# Altium PCB PCB1.PcbDoc (part 1 of 2)
Units mm, origin at the board's own origin, x right, y up, seen from the top; angles counter-clockwise.
Board outline 52.96 x 71.5 mm, 2 copper layers (Top Layer, Bottom Layer); 40 components, 74 nets, 275 pads, 212 vias.
Unrouted connection lines stored in the file: 1.
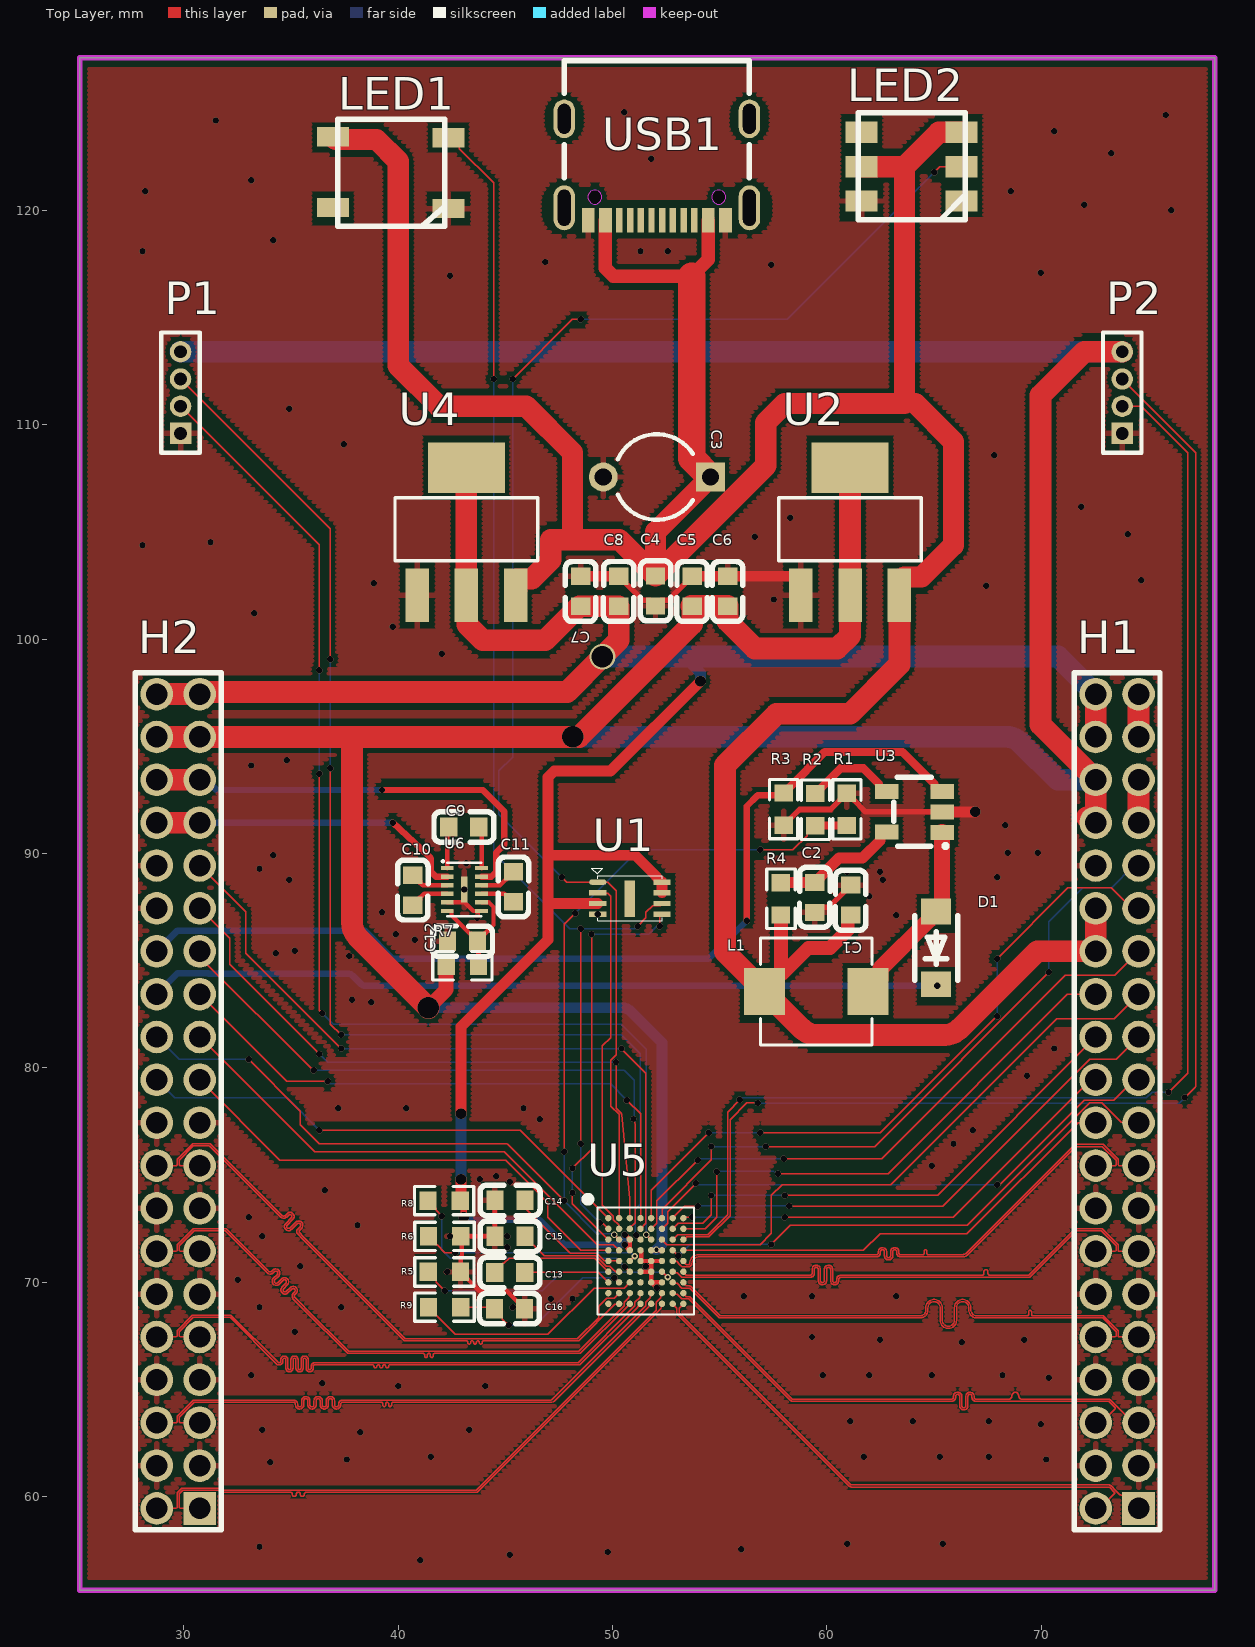
[diagram p0: Top Layer view]
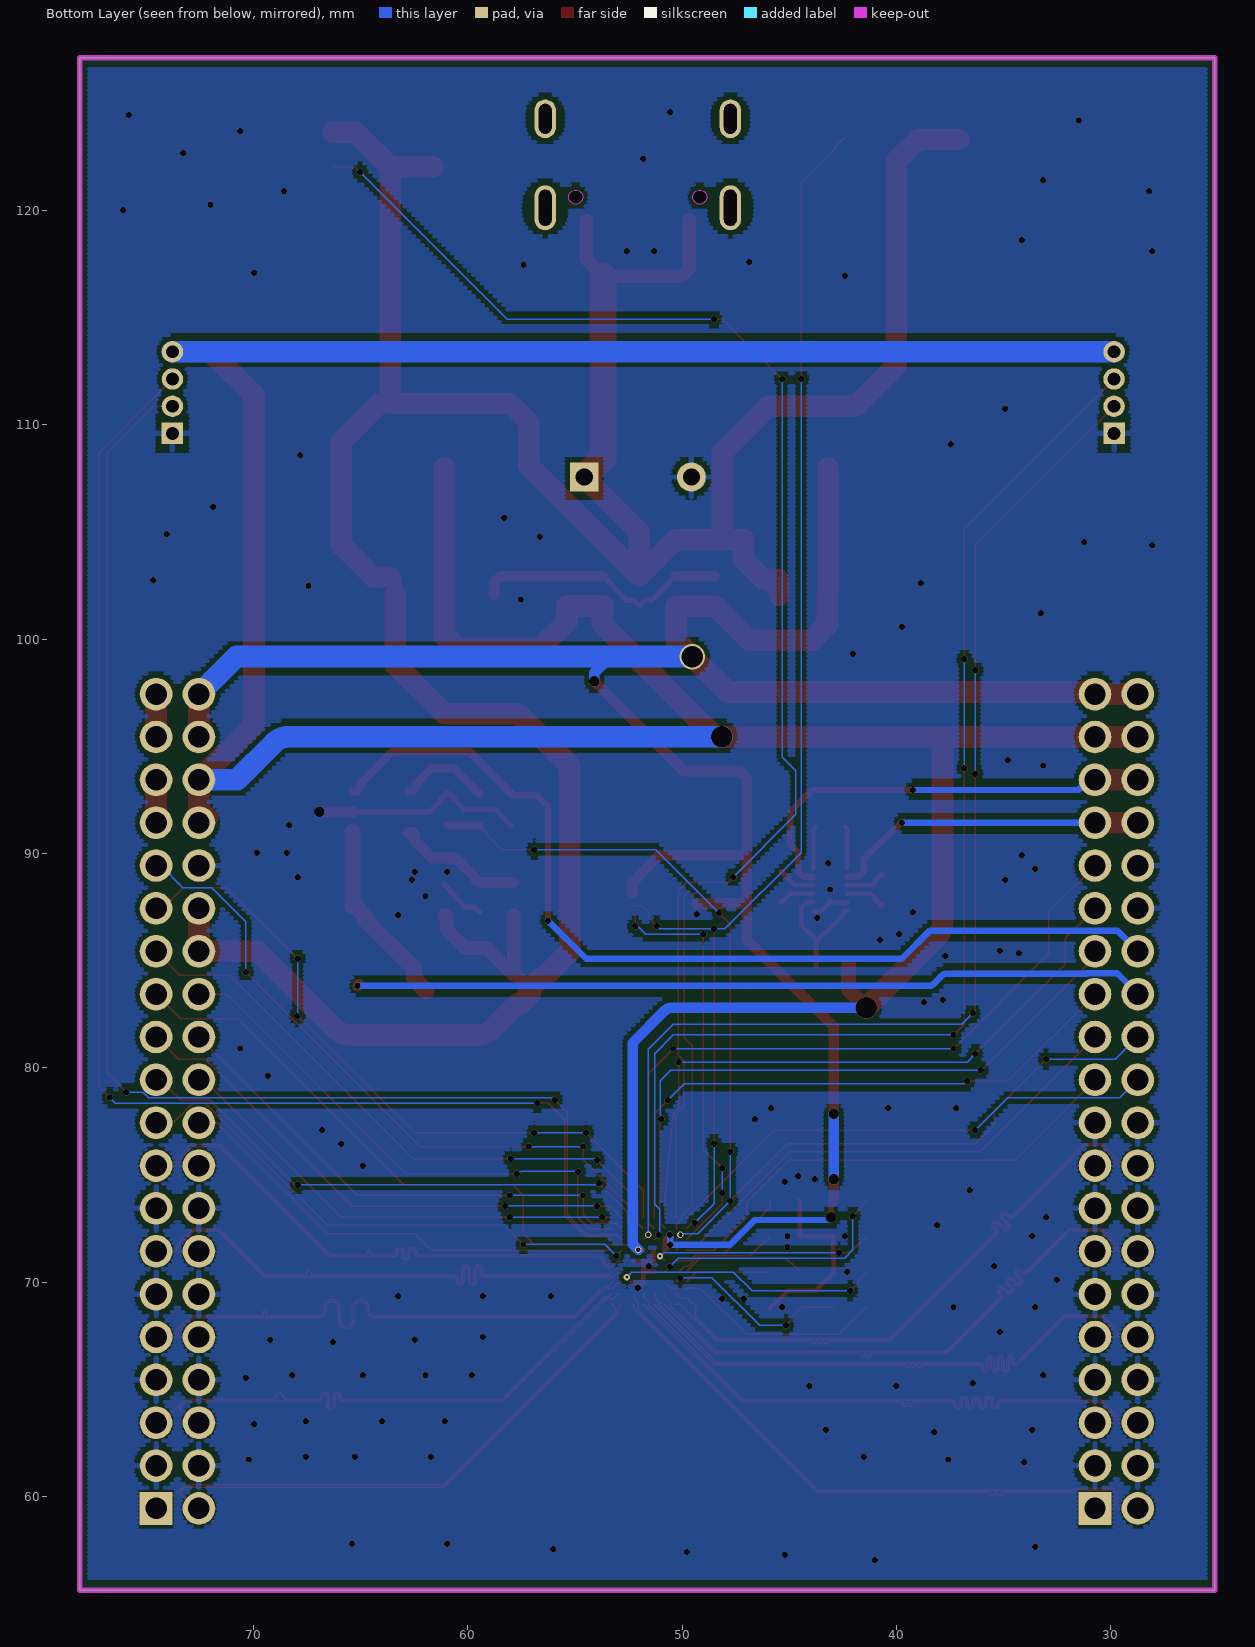
[diagram p1: Bottom Layer view, seen from below]

## Layer stack, top to bottom
Top Solder: solder mask 0.0102, Solder Resist, Dk 3.5
Top Layer: signal copper 0.0356
Dielectric 1: dielectric 0.32, FR-4, Dk 4.8
Bottom Layer: signal copper 0.0356
Bottom Solder: solder mask 0.0102, Solder Resist, Dk 3.5

## Board outline
25.146,55.626 25.146,127.127 78.105,127.127 78.105,55.626

## Design rules (kind name [scope] priority, off if disabled: settings)
Clearance Clearance_5 [InDifferentialPairClass('TD_MIPI')] p1: gap=0.04 ignorepadtopadclearanceinfootprint=FALSE
Clearance Clearance_4 [InDifferentialPairClass('AP_MIPI')] p2: gap=0.04 ignorepadtopadclearanceinfootprint=FALSE
Clearance [InComponent('TFT1')] p3: gap=0.04 ignorepadtopadclearanceinfootprint=TRUE
Clearance Clearance_3 [All] p4: gap=0.05 ignorepadtopadclearanceinfootprint=TRUE
Clearance Clearance_2 [All] p5 off: gap=0.2 ignorepadtopadclearanceinfootprint=FALSE // Protel DXP Scope 1 Expression Was: (InPolygon)   Protel DXP Scope 1 Expression Was: (InPolygon)   Protel DXP Scope 1 Expression Was: (InPolygon)   Protel DXP Scope 1 Expression Was: (InPolygon)   Protel DXP Scope 1 Expression Was: (InPolygon)   Protel DXP
Clearance Clearance_1 [All] p6 off: gap=0.1 ignorepadtopadclearanceinfootprint=FALSE // Protel DXP Scope 1 Expression Was: (IsVia)   Protel DXP Scope 1 Expression Was: (IsVia)   Protel DXP Scope 1 Expression Was: (IsVia)   Protel DXP Scope 1 Expression Was: (IsVia)   Protel DXP Scope 1 Expression Was: (IsVia)   Protel DXP Scope 1 Expression
ComponentClearance [All] p1 off: gap=0.254 collisioncheckmode=3 verticalgap=0.254 showdistances=FALSE
DiffPairsRouting [All] p1: maxlimit=0.254 minlimit=0.04 mostfreqgap=0.04 toplayer_minwidth=0.06 toplayer_maxwidth=0.06 toplayer_prefwidth=0.06 bottomlayer_minwidth=0.06 bottomlayer_maxwidth=0.06 bottomlayer_prefwidth=0.06 maxuncoupledlength=12.7
FabricationTestPointUsage TestPointUsage [All] p1: valid=0 allowmultiple=FALSE
FabricationTestpoint Testpoint [All] p1: side=3 testpointundercomponent=TRUE minsize=1.016 maxsize=2.54 preferedsize=1.524 minholesize=0 maxholesize=1.016 preferedholesize=0.813 testpointgrid=0.025 allowsidetop=TRUE allowsidebottom=TRUE usegrid=TRUE gridtolerance=0
FanoutControl Fanout_Small [All] p1 off: bgadir=Out bgaviamode=Centered fanoutstyle=Auto fanoutdirection=Alternating viagrid=0.025 // Protel DXP Scope 1 Expression Was: (CompPinCount < 5)   Fanout_Small (Default Rule)
FanoutControl Fanout_Default [All] p2: bgadir=Out bgaviamode=Centered fanoutstyle=Auto fanoutdirection=Alternating viagrid=0.025 // Fanout_Default (Default Rule)
FanoutControl Fanout_SOIC [All] p3 off: bgadir=Out bgaviamode=Centered fanoutstyle=Auto fanoutdirection=Alternating viagrid=0.025 // Protel DXP Scope 1 Expression Was: IsSOIC   Fanout_SOIC (Default Rule)
FanoutControl Fanout_BGA [All] p4 off: bgadir=Out bgaviamode=Centered fanoutstyle=Auto fanoutdirection=Alternating viagrid=0.025 // Protel DXP Scope 1 Expression Was: IsBGA   Fanout_BGA (Default Rule)
FanoutControl Fanout_LCC [All] p5 off: bgadir=Out bgaviamode=Centered fanoutstyle=Auto fanoutdirection=Alternating viagrid=0.025 // Protel DXP Scope 1 Expression Was: IsLCC   Fanout_LCC (Default Rule)
HoleSize [All] p1 off: absolutevalues=TRUE maxlimit=2.54 minlimit=0.025 maxpercent=80.000 minpercent=20.000
HoleToHoleClearance [All] p1: gap=0 allowstackedmicrovias=TRUE
MinimumSolderMaskSliver [All] p1: minsoldermaskwidth=0
PolygonConnect [All] p1: thpad.connectstyle=Relief thpad.reliefconductorwidth=0.254 thpad.reliefentries=4 thpad.polygonreliefangle="90 Angle" thpad.airgapwidth=0.254 smdpad.connectstyle=Relief smdpad.reliefconductorwidth=0.254 smdpad.reliefentries=4 smdpad.polygonreliefangle="90 Angle" smdpad.airgapwidth=0.254 via.connectstyle=Direct via.reliefconductorwidth=0.254 via.reliefentries=4 via.polygonreliefangle="90 Angle" via.airgapwidth=0.254
RoutingCorners [All] p1 off: cornerstyle=Round minsetback=2.54 maxsetback=5.08
RoutingVias [All] p1: holewidth=0.2 width=0.4 viastyle="Through Hole" minholewidth=0.1 minwidth=0.25 maxholewidth=0.3 maxwidth=0.5
ShortCircuit [All] p1 off: allowed=FALSE
SilkToSilkClearance [All] p1: silktosilkclearance=0
SilkToSolderMaskClearance [IsPad] p1: minsilkscreentomaskgap=0 clearancetoexposedcopper=TRUE
SolderMaskExpansion [All] p1: expansion=0.102 istentingtop=FALSE
UnConnectedPin [All] p1 off:
Width [All] p1: maxlimit=2 minlimit=0.06 preferedwidth=0.2
14 further rules are at their usual default settings.

## Classes and differential pairs
differential pair class TD_MIPI: TD_CLK TD_D0 TD_D1 TD_D2 TD_D3
differential pair class AP_MIPI: AP_CLK AP_D0 AP_D1 AP_D2 AP_D3
differential pair AP_D3: +AP_D3P -AP_D3N
differential pair AP_D2: +AP_D2P -AP_D2N
differential pair AP_D1: +AP_D1P -AP_D1N
differential pair AP_D0: +AP_D0P -AP_D0N
differential pair AP_CLK: +AP_CLKP -AP_CLKN
differential pair TD_D3: +TD_D3P -TD_D3N
differential pair TD_D2: +TD_D2P -TD_D2N
differential pair TD_D1: +TD_D1P -TD_D1N
differential pair TD_D0: +TD_D0P -TD_D0N
differential pair TD_CLK: +TD_CLKP -TD_CLKN

## Components (designator, comment, footprint, x,y, rotation, side; value= is the part's Value field where it differs from the comment)
C1 "47UF" C0603 61.115,87.822 r90 top
C2 "1UF" C0603 59.436,87.949 r270 top
C3 "Cap2" CAPR5-4X5 52.07,107.569 r180 top value=100pF
C4 "1UF" C0603 52.006,102.25 r270 top
C5 "10UF" C0603 53.721,102.235 r90 top
C6 "1UF" C0603 55.372,102.235 r90 top
C7 "10UF" C0603 48.514,102.235 r90 top
C8 "1UF" C0603 50.292,102.235 r90 top
C9 "1uF/10V" C0603 43.06,91.24 r180 top
C10 "1uF/10V" C0603 40.678,88.288 r270 top
C11 "1uF/10V" C0603 45.377,88.446 r90 top
C12 "4.7uF/6.3V" C0603 42.995,85.906 r180 top
C13 "1UF,6.3V,X5R" C0603 45.206,70.449 r180 top
C14 "1UF" C0603 45.214,73.813 r180 top
C15 "1UF,6.3V,X5R" C0603 45.212,72.136 r180 top
C16 "4.7UF" C0603 45.198,68.759 r0 top
D1 "1N5819HW-7-F" SOD-123_L2.8-W1.8-LS3.7-FD 65.101,85.592 r270 top
H1 "PZ200-2-20-Z" HDR-TH_40P-P2.00-V-M-R2-C20-S2.00 73.549,78.438 r90 top
H2 "PZ200-2-20-Z" HDR-TH_40P-P2.00-V-M-R2-C20-S2.00 29.734,78.438 r90 top
L1 "L_4R7uH" IND-SMD_L5.2-W5.1 59.513,83.56 r180 top value=4.7uH
LED1 "WS2812" WS2812_LED_4 79.083,194.962 r0 top
LED2 "WS2812" WS2812_LED_6 66.294,120.447 r0 top
P1 "MHDR1X4" MHDR1X4 29.845,109.601 r90 top
P2 "MHDR1X4" MHDR1X4 73.787,109.601 r90 top
R1 "Res2" R0603 60.936,92.061 r270 top value=100K
R2 "Res2" R0603 59.463,92.044 r270 top value=10K
R3 "Res2" R0603 57.989,92.069 r90 top value=5R
R4 "Res2" R0603 57.862,87.887 r270 top value=10R
R5 "Res2" R0603 42.155,70.472 r0 top value=4.02K
R6 "Res2" R0603 42.164,72.136 r0 top value=4.02K
R7 "0R" R0603 42.995,84.763 r180 top
R8 "Res2" R0603 42.146,73.798 r0 top value=NC
R9 "Res2" R0603 42.164,68.834 r0 top value="0R %5"
U1 "ZB25LD20A" "FLASH-WSON-8- 2X3mm" 50.814,87.915 r0 top
U2 "AMS1117-3.3" SOT-223-3_L6.5-W3.4-P2.30-LS7.0-BR 61.087,105.029 r270 top
U3 "MP3302DJ" TSOT-23-5_L2.9-W1.6-P0.95-LS2.8-BR 64.085,91.942 r0 top
U4 "AMS1117-1.8" SOT-223-3_L6.5-W3.4-P2.30-LS7.0-BR 43.18,105.029 r270 top
U5 "WL518/WL308" "WL518-BGA72 4.5mm*5mm" 49.808,72.985 r0 top
U6 "FP7721X2" FP7721X2 42.291,89.519 r0 top
USB1 "TYPE-C 16P(073)" USB-C-SMD_TYPE-C16PIN_C668624 52.07,121.92 r180 top

## Footprints (in the part's own frame and the unit in brackets; to place one, negate y for a bottom-side part, rotate by r counter-clockwise, add the part's x,y. Pads: shape width x height; smd on the part's side, far side on the other; paste and mask are expansions set on the pad)
C0603 [mm]
  rect 0.8x0.9 smd mask+0.051: 1(-0.7,0) 2(0.7,0)
  silkscreen extent -1.41,-0.71 1.39,0.72
CAPR5-4X5 [mm] "Capacitor; 2 Leads"
  rect 1.35x1.35 hole 0.8: 1(-2.5,0)
  round 1.35 hole 0.8: 2(2.5,0)
  silkscreen extent -1.69,-2 1.82,2
"FLASH-WSON-8- 2X3mm" [mm]
  rect 0.5x1.7 smd: 0(-0.014,-0.031)
  oval 0.8x0.25 smd: 1(-1.5,0.75)
  rect 0.8x0.25 smd: 2(-1.5,0.25) 3(-1.5,-0.25) 4(-1.5,-0.75) 5(1.5,-0.75) 6(1.5,-0.25) 7(1.5,0.25) 8(1.5,0.75)
  silkscreen extent -1.8,-1.05 1.5,1.4, body extent -1.5,-1 1.5,1, height 0.6
FP7721X2 [mm] "UTDFN-12(2.4mm x 1.5mm)"
  rect 0.6x0.2 smd: 1(0,-0.2) 2(0,-0.6) 3(0,-1) 4(0,-1.4) 5(0,-1.8) 6(0,-2.2) 7(1.6,-2.2) 8(1.6,-1.8) 9(1.6,-1.4) 10(1.6,-1) 11(1.6,-0.6) 12(1.6,-0.2)
  rect 0.3x1.2 smd: 5(0.8,-1.2)
  silkscreen extent -0.26,-2.45 1.6,0.17, body extent 0,-2.45 1.6,0.05, height 0.6
HDR-TH_40P-P2.00-V-M-R2-C20-S2.00 [mm]
  rect 1.524x1.524 hole 1 mask+0.051: 1(-19,-1)
  round 1.524 hole 1 mask+0.051: 2(-19,1) 3(-17,-1) 4(-17,1) 5(-15,-1) 6(-15,1) 7(-13,-1) 8(-13,1) 9(-11,-1) 10(-11,1) 11(-9,-1) 12(-9,1) 13(-7,-1) 14(-7,1) 15(-5,-1) 16(-5,1) 17(-3,-1) 18(-3,1) 19(-1,-1) 20(-1,1) 21(1,-1) 22(1,1) 23(3,-1) 24(3,1) 25(5,-1) 26(5,1) 27(7,-1) 28(7,1) 29(9,-1) 30(9,1) 31(11,-1) 32(11,1) 33(13,-1) 34(13,1) 35(15,-1) 36(15,1) 37(17,-1) 38(17,1) 39(19,-1) 40(19,1)
  silkscreen extent -20,-2 20,2
IND-SMD_L5.2-W5.1 [mil]
  rect 75.7x86.6 smd mask+2: 1(95,0) 2(-95,0)
  silkscreen extent -102,-98 102,98
MHDR1X4 [mm] "Connector; Header; 4 Position"
  rect 1x1 hole 0.6: 1(0,0)
  round 1 hole 0.6: 2(1.27,0) 3(2.54,0) 4(3.81,0)
  silkscreen extent -0.9,-0.9 4.71,0.9
R0603 [mm]
  rect 0.806x0.864 smd mask+0.051: 1(-0.753,0) 2(0.753,0)
  silkscreen extent -1.39,-0.66 1.39,0.66
SOD-123_L2.8-W1.8-LS3.7-FD [mm]
  rect 1.199x1.4 smd mask+0.051: 1(-1.699,0) 2(1.699,0)
  silkscreen extent -1.5,-1 1.5,1
SOT-223-3_L6.5-W3.4-P2.30-LS7.0-BR [mm]
  rect 2.5x1.1 smd mask+0.051: 1(2.97,-2.3) 2(2.97,0) 3(2.97,2.3)
  rect 2.34x3.6 smd mask+0.051: 4(-2.97,0)
  silkscreen extent -1.57,-3.33 1.37,3.33
TSOT-23-5_L2.9-W1.6-P0.95-LS2.8-BR [mm]
  rect 1.1x0.7 smd mask+0.102: 1(1.294,-0.951) 2(1.294,-0.001) 3(1.294,0.951) 4(-1.294,0.951) 5(-1.294,-0.949)
  silkscreen extent -0.97,-1.65 1.52,1.61
USB-C-SMD_TYPE-C16PIN_C668624 [mm]
  oval 1x2.1 hole 0.6 slot 1.7 at 90 deg mask+0.051: 1(-4.32,1.787) 2(4.32,1.787)
  oval 1x1.8 hole 0.6 slot 1.4 at 90 deg mask+0.051: 3(-4.32,-2.362) 4(4.32,-2.362)
  rect 0.6x1.15 smd mask+0.051: A1B12(-3.2,2.362) A4B9(-2.4,2.362) B1A12(3.2,2.362) B4A9(2.4,2.362)
  rect 0.3x1.15 smd mask+0.051: A5(-1.25,2.362) A6(-0.25,2.362) A7(0.25,2.362) A8(1.25,2.362) B5(1.75,2.362) B6(0.75,2.362) B7(-0.75,2.362) B8(-1.75,2.362)
  Keep-Out Layer board cut-out: -2.565,1.288 -2.565,1.352 -2.614,1.472 -2.706,1.563 -2.825,1.613 -2.955,1.613 -3.074,1.563 -3.166,1.472 -3.215,1.352 -3.215,1.288 -3.215,1.223 -3.166,1.103 -3.074,1.012 -2.955,0.963 -2.825,0.963 -2.706,1.012 -2.614,1.103 -2.565,1.223 -2.565,1.288 -2.565,1.288
  Keep-Out Layer board cut-out: 3.215,1.288 3.215,1.352 3.166,1.472 3.074,1.563 2.955,1.613 2.825,1.613 2.706,1.563 2.614,1.472 2.565,1.352 2.565,1.288 2.565,1.223 2.614,1.103 2.706,1.012 2.825,0.963 2.955,0.963 3.074,1.012 3.166,1.103 3.215,1.223 3.215,1.288 3.215,1.288
  silkscreen extent -4.32,-5.08 4.32,0.38
"WL518-BGA72 4.5mm*5mm" [mm]
  round 0.3 smd: A1(0,0) A2(0.5,0) A3(1,0) A4(1.5,0) A5(2,0) A6(2.5,0) A7(3,0) A8(3.5,0) B1(0,-0.5) B2(0.5,-0.5) B3(1,-0.5) B4(1.5,-0.5) B5(2,-0.5) B6(2.5,-0.5) B7(3,-0.5) B8(3.5,-0.5) C1(0,-1) C2(0.5,-1) C3(1,-1) C4(1.5,-1) C5(2,-1) C6(2.5,-1) C7(3,-1) C8(3.5,-1) D1(0,-1.5) D2(0.5,-1.5) D3(1,-1.5) D4(1.5,-1.5) D5(2,-1.5) D6(2.5,-1.5) D7(3,-1.5) D8(3.5,-1.5) E1(0,-2) E2(0.5,-2) E3(1,-2) E4(1.5,-2) E5(2,-2) E6(2.5,-2) E7(3,-2) E8(3.5,-2) F1(0,-2.5) F2(0.5,-2.5) F3(1,-2.5) F4(1.5,-2.5) F5(2,-2.5) F6(2.5,-2.5) F7(3,-2.5) F8(3.5,-2.5) G1(0,-3) G2(0.5,-3) G3(1,-3) G4(1.5,-3) G5(2,-3) G6(2.5,-3) G7(3,-3) G8(3.5,-3) H1(0,-3.5) H2(0.5,-3.5) H3(1,-3.5) H4(1.5,-3.5) H5(2,-3.5) H6(2.5,-3.5) H7(3,-3.5) H8(3.5,-3.5) J1(0,-4) J2(0.5,-4) J3(1,-4) J4(1.5,-4) J5(2,-4) J6(2.5,-4) J7(3,-4) J8(3.5,-4)
  silkscreen extent -1.05,-4.5 4,0.98
WS2812_LED_4 [mm]
  rect 1.5x0.9 smd: 1(-42.126,-71.52) 2(-42.126,-74.82) 3(-36.741,-74.866) 4(-36.741,-71.566)
  silkscreen extent -41.91,-75.69 -36.91,-70.69
WS2812_LED_6 [mm]
  rect 1.5x1 smd: 1(0,0) 2(0,1.6) 3(0,3.2) 4(-4.668,3.2) 5(-4.668,1.6) 6(-4.668,0)
  silkscreen extent -4.83,-0.87 0.17,4.13

## Part data
C1 C2 C4 C5 C6 C7 C8 C9 C10 C11 C12 C13 C14 C15 C16: library part Cap, "Capacitor"
  C1 C2 C4 C5 C6 C7 C8 C13 C14 C15 C16: LatestRevisionDate=17-Jul-2002, LatestRevisionNote="Re-released for DXP Platform.", PackageDescription="Radial Cap, Thru-Hole; 2 Leads; 0.3 in Pin Spacing", PackageReference=RAD-0.3, Published=8-Jun-2000, Publisher="Altium Limited"
  C9 C10 C11 C12: Parameter="10V，X7R, ±10%"
C3: "Capacitor", PackageDescription="Capacitor; 2 Leads", PackageReference=CAPR5-4X5, Published=23-Sep-2002, Publisher="Altium Limited"
D1: Average Rectified Current (Io)=1A, Forward Voltage (Vf@If)=450mV@1A, JLCPCB Part Class="Extended Part", LCSC Part Name="40V 1A 450mV@1A", Manufacturer=DIODES(美台), Reverse Voltage (Vr)=40V, Add into BOM=yes, Convert to PCB=yes, Datasheet=https://atta.szlcsc.com/upload/public/pdf/source/20161024/1477288459223.pdf, Device=1N5819HW-7-F, Manufacturer Part=1N5819HW-7-F, Name=1N5819HW-7-F, Supplier=LCSC, Supplier Footprint=SOD-123, Supplier Part=C82544, Symbol=1N5819HW-7-F
H1 H2: library part 排针2X20P, Color=黑色, Current Rating (Max)=1.5A, JLCPCB Part Class="Extended Part", LCSC Part Name="2mm 2x20P 直插 方针", Manufacturer=HCTL(华灿天禄), Operating Temperature Range=-40℃~+105℃, Voltage Rating (Max)=-, Add into BOM=yes, Circluar Pins/Square Pins=方针, Convert to PCB=yes, Datasheet=https://atta.szlcsc.com/upload/public/pdf/source/20211108/81EC9D0128C817B17F97D545889289A1.pdf, Device=PZ200-2-20-Z, Insulation Height=2mm, Length of End Connection Pin=2.8mm, Length of Mating Pin=3.9mm, Manufacturer Part=PZ200-2-20-Z, Mounting Type=直插, Name=PZ200-2-20-Z, Number of Pins=40, Number of Rows=2, Pin Structure=2x20P, Pitch=2mm, Row Spacing=2mm, Supplier=LCSC, Supplier Footprint=插件,P=2mm, Supplier Part=C2906006, Symbol=PZ200-2-20-Z
L1: library part SPM5030T-4R7M-HZ, "4R7uH电感 SMD封装 SPM5030T-4R7M-HZ", DC Resistance (DCR)=45mΩ, JLCPCB Part Class="Extended Part", LCSC Part Name="4.7uH ±20% 4A 45mΩ", Manufacturer=TDK, Rated Current=4A, Tolerance=±20%, Add into BOM=yes, Convert to PCB=yes, Datasheet=https://atta.szlcsc.com/upload/public/pdf/source/20191009/C435271_9A6F67BD8321F0FE2BD27E7481E0EA5D.pdf, Device=SPM5030T-4R7M-HZ, Manufacturer Part=SPM5030T-4R7M-HZ, Name=4.7uH, Supplier=LCSC, Supplier Footprint=SMD, Supplier Part=C435271, Symbol=SPM5030T-4R7M-HZ
LED1: library part WS2812_LED_4, "WS2812 LED 4P"
LED2: library part WS2812_LED_6, "WS2812 LED 6P"
P1 P2: "Header, 4-Pin", LatestRevisionDate=17-Jul-2002, LatestRevisionNote="Re-released for DXP Platform.", Publisher="Altium Limited"
R1 R2 R3 R4 R5 R6 R8 R9: "Resistor", LatestRevisionDate=17-Jul-2002, LatestRevisionNote="Re-released for DXP Platform.", PackageDescription="Axial Device, Thru-Hole; 2 Leads; 0.4 in Pin Spacing", PackageReference=AXIAL-0.4, Published=8-Jun-2000, Publisher="Altium Limited"
R7: library part Res_5%, "Resistor", Parameter=±5%
U1: "FLASH", Parameter="WSON-8- 2X3mm"
U2: library part AMS1117-3.3_C6186, Dropout Voltage=1.3V@(800mA), JLCPCB Part Class="Basic Part", LCSC Part Name="Vout=3.3V 1A 72dB@(120Hz)", Manufacturer=美国AMS, Maximum Input Voltage=-, Output Current=1A, Output Voltage=3.3V, Power Supply Rejection Ratio (PSRR)=72dB@(120Hz), Add into BOM=yes, Convert to PCB=yes, Datasheet=https://atta.szlcsc.com/upload/public/pdf/source/20180727/C6186_7A095716F0823C02F1997A905E26C086.pdf, Device=AMS1117-3.3_C6186, Feature=-, Manufacturer Part=AMS1117-3.3, Name=AMS1117-3.3, Noise=-, Number of Outputs=1, Operating Temperature=-, Output Polarity=正, Output Type=固定, Quiescent Current (Ground Current)=-, Supplier=LCSC, Supplier Footprint=SOT-223, Supplier Part=C6186, Symbol=AMS1117-3.3
U3: "5V-24V电平转换芯片", Add into BOM=yes, Convert to PCB=yes, Device=MP3302DJ, Name=MP3302DJ, PCB DECAL=TSOT-23-5_L2.9-W1.6-P0.95-LS2.8-BR, Symbol=MP3302DJ
U4: library part AMS1117-3.3_C6186, Dropout Voltage=1.3V@(800mA), JLCPCB Part Class="Basic Part", LCSC Part Name="Vout=3.3V 1A 72dB@(120Hz)", Manufacturer=美国AMS, Manufacturer Part=AMS1117-3.3, Maximum Input Voltage=-, Output Current=1A, Output Voltage=3.3V, Power Supply Rejection Ratio (PSRR)=72dB@(120Hz), Add into BOM=yes, Convert to PCB=yes, Datasheet=https://atta.szlcsc.com/upload/public/pdf/source/20180727/C6186_7A095716F0823C02F1997A905E26C086.pdf, Device=AMS1117-3.3_C6186, Feature=-, Name=AMS1117-3.3, Noise=-, Number of Outputs=1, Operating Temperature=-, Output Polarity=正, Output Type=固定, Quiescent Current (Ground Current)=-, Supplier=LCSC, Supplier Footprint=SOT-223, Supplier Part=C6186, Symbol=AMS1117-3.3
U5: library part "BGA72 4.5mm*5mm"
USB1: Current Rating - Power (Max)=5A, JLCPCB Part Class="Extended Part", LCSC Part Name="TYPE-C母座 16P 4脚插件带定位柱 不锈钢外壳 3次模顶", Manufacturer="SHOU HAN(首韩)", Operating Temperature Range=-25℃~+85℃, Add into BOM=yes, Connector Type=Type-C, Convert to PCB=yes, Datasheet=https://atta.szlcsc.com/upload/public/pdf/source/20200618/C668624_CC51EC37614090AAD56C1421DE954C80.pdf, Device="TYPE-C 16P(073)", Gender=母座, Manufacturer Part="TYPE-C 16P(073)", Mounting Sytle=卧贴, Name="TYPE-C 16P(073)", Number of Contacts=16, Number of Ports=1, Standard=-, Supplier=LCSC, Supplier Footprint=SMD, Supplier Part=C668624, Symbol="TYPE-C 16P(073)"

## Via types
v1: diameter 0.3, hole 0.3, Top Layer to Bottom Layer, tented both sides, 199 vias
v2: diameter 0.5, hole 0.5, Top Layer to Bottom Layer, tented both sides, 5 vias
v3: diameter 0.3, hole 0.2, Top Layer to Bottom Layer, tented both sides, 3 vias
v4: diameter 1, hole 1, Top Layer to Bottom Layer, tented both sides, 2 vias
v5: diameter 0.3, hole 0.15, Top Layer to Bottom Layer, tented both sides, 2 vias
v6: diameter 1.2, hole 1, Top Layer to Bottom Layer, tented both sides, 1 vias

## Nets (pads, with @x,y where several pads share a name; then routed paths per layer and width w, separated by ;. In a path a pad name is that pad's centre, name@x,y a point inside that pad or via, vN(x,y) a via of type N, cw(c..) or ccw(c..) an arc to the next point about the centre after c; other vN are vias at no path point)
ADC_IN: H1.31 U5.A6 | length 31
  Top Layer w0.06: U5.A6@52.308,72.985 52.324,73.001 52.324,73.382 cw(c52.384,73.381) 52.341,73.423 54.593,75.675 ccw(c54.55,75.717) 54.61,75.717 v1(54.61,76.327) ; v1(57.15,76.327) 62.23,76.327 v1(70.358,84.455)
  Bottom Layer w0.06: v1(54.61,76.327) v1(57.15,76.327) ; v1(70.358,84.455) 70.358,86.815 71.918,88.374 cw(c71.96,88.332) 71.96,88.392 73.254,88.392 ccw(c73.254,88.452) 73.297,88.41 74.308,89.421 cw(c74.35,89.378) 74.349,89.438 H1.31@74.549,89.438
AP_CLKN: H1.9 U5.G8 | length 25.8
  Top Layer w0.06: U5.G8@53.308,69.985 53.308,69.945 53.433,69.82 53.572,69.82 cw(c53.572,69.66) 53.685,69.774 55.015,68.443 ccw(c55.057,68.486) 55.057,68.426 64.257,68.426 64.337,68.426 ccw(c64.337,68.71) 64.621,68.71 64.621,68.811 cw(c65.005,68.811) 65.389,68.811 65.389,68.222 ccw(c65.673,68.222) 65.957,68.222 65.957,68.811 cw(c66.341,68.811) 66.725,68.811 66.725,68.71 ccw(c67.009,68.71) 67.009,68.426 67.454,68.426 69.32,68.426 69.35,68.426 ccw(c69.35,68.494) 69.418,68.494 69.418,68.612 cw(c69.486,68.612) 69.554,68.612 69.554,68.494 ccw(c69.622,68.494) 69.622,68.426 69.966,68.426 72.907,68.426 73.599,67.734 73.599,67.473 73.634,67.438 H1.9@74.549,67.438
AP_CLKP: H1.10 U5.G7 | length 25.7
  Top Layer w0.06: U5.G7@52.808,69.985 52.854,69.939 53.022,69.939 53.241,69.72 53.572,69.72 cw(c53.572,69.66) 53.614,69.703 54.945,68.372 ccw(c55.057,68.486) 55.057,68.326 64.257,68.326 64.337,68.326 ccw(c64.337,68.71) 64.721,68.71 64.721,68.811 cw(c65.005,68.811) 65.289,68.811 65.289,68.222 ccw(c65.673,68.222) 66.057,68.222 66.057,68.811 cw(c66.341,68.811) 66.625,68.811 66.625,68.71 ccw(c67.009,68.71) 67.009,68.326 67.454,68.326 72.866,68.326 73.499,67.693 73.499,67.473 73.464,67.438 H1.10@72.549,67.438
AP_CS: H1.26 U5.B8 | length 25.1
  Top Layer w0.06: U5.B8@53.308,72.485 54.324,72.485 54.864,73.025 v1@54.864,75.151 ; v1(57.722,75.052) 57.726,75.057 62.865,75.057 71.229,83.421 cw(c71.271,83.378) 71.27,83.438 ; 71.271,83.438 H1.26@72.549,83.438
  Bottom Layer w0.06: v1@54.822,75.184 57.531,75.184 ; 57.567,75.151 57.665,75.052 v1(57.722,75.052)
  other v1: 54.857,75.151
AP_D0N: H1.13 U5.F8 | length 25.8
  Top Layer w0.06: U5.F8@53.308,70.485 53.308,70.445 53.386,70.367 53.415,70.337 ccw(c53.458,70.38) 53.458,70.32 59.14,70.32 59.22,70.32 ccw(c59.22,70.413) 59.314,70.413 59.314,70.594 cw(c59.507,70.594) 59.701,70.594 59.701,70.069 ccw(c59.794,70.069) 59.888,70.069 59.888,70.594 cw(c60.081,70.594) 60.275,70.594 60.275,70.069 ccw(c60.368,70.069) 60.462,70.069 60.462,70.126 cw(c60.655,70.126) 60.655,70.32 61.094,70.32 67.209,70.32 67.239,70.32 ccw(c67.239,70.413) 67.332,70.413 67.332,70.491 cw(c67.426,70.491) 67.519,70.491 67.519,70.413 ccw(c67.613,70.413) 67.613,70.32 68.043,70.32 69.406,70.32 ccw(c69.406,70.38) 69.448,70.337 71.555,72.444 cw(c71.667,72.33) 71.667,72.49 72.843,72.49 73.599,71.734 73.599,71.473 73.634,71.438 H1.13@74.549,71.438
AP_D0P: H1.14 U5.F7 | length 25.8
  Top Layer w0.06: U5.F7@52.808,70.485 52.854,70.439 53.022,70.439 53.241,70.22 59.14,70.22 59.22,70.22 ccw(c59.22,70.413) 59.414,70.413 59.414,70.594 cw(c59.507,70.594) 59.601,70.594 59.601,70.069 ccw(c59.794,70.069) 59.988,70.069 59.988,70.594 cw(c60.081,70.594) 60.175,70.594 60.175,70.069 ccw(c60.368,70.069) 60.562,70.069 60.562,70.126 cw(c60.655,70.126) 60.655,70.22 61.094,70.22 69.406,70.22 ccw(c69.406,70.38) 69.519,70.266 71.625,72.373 cw(c71.667,72.33) 71.667,72.39 72.802,72.39 73.499,71.693 73.499,71.473 73.464,71.438 H1.14@72.549,71.438
AP_D1N: H1.5 U5.H8 | length 25.7
  Top Layer w0.06: U5.H8@53.308,69.485 53.308,69.445 53.433,69.32 53.598,69.32 53.73,69.188 58.366,64.553 ccw(c58.408,64.596) 58.408,64.536 65.739,64.536 65.819,64.536 ccw(c65.819,64.629) 65.913,64.629 65.913,64.669 cw(c66.106,64.669) 66.3,64.669 66.3,64.232 ccw(c66.393,64.232) 66.487,64.232 66.487,64.669 cw(c66.68,64.669) 66.874,64.669 66.874,64.629 ccw(c66.967,64.629) 66.967,64.536 67.474,64.536 68.453,64.536 68.483,64.536 ccw(c68.483,64.693) 68.64,64.693 68.64,64.699 cw(c68.797,64.699) 68.954,64.699 68.954,64.693 ccw(c69.111,64.693) 69.111,64.536 69.356,64.536 73.139,64.536 cw(c73.139,64.376) 73.252,64.489 73.511,64.23 cw(c73.397,64.118) 73.515,64.226 73.589,64.145 74.296,63.438 H1.5@74.549,63.438
AP_D1P: H1.6 U5.H7 | length 25.7
  Top Layer w0.06: U5.H7@52.808,69.485 52.854,69.439 53.022,69.439 53.241,69.22 53.557,69.22 53.689,69.088 58.295,64.482 ccw(c58.408,64.596) 58.408,64.436 65.739,64.436 65.819,64.436 ccw(c65.819,64.629) 66.013,64.629 66.013,64.669 cw(c66.106,64.669) 66.2,64.669 66.2,64.232 ccw(c66.393,64.232) 66.587,64.232 66.587,64.669 cw(c66.68,64.669) 66.774,64.669 66.774,64.629 ccw(c66.967,64.629) 66.967,64.436 67.474,64.436 73.139,64.436 cw(c73.139,64.376) 73.182,64.418 73.44,64.16 cw(c73.397,64.118) 73.44,64.076 72.802,63.438 H1.6@72.549,63.438
AP_D2N: H1.1 U5.J8 | length 25.7
  Top Layer w0.06: U5.J8@53.308,68.985 53.108,68.785 53.108,68.583 ccw(c53.168,68.583) 53.125,68.541 61.114,60.552 ccw(c61.156,60.595) 61.156,60.535 73.154,60.535 cw(c73.154,60.375) 73.267,60.488 73.486,60.27 73.673,60.082 ccw(c73.716,60.125) 73.716,60.065 73.922,60.065 H1.1@74.549,59.438
AP_D2P: H1.2 U5.J7 | length 25.6
  Top Layer w0.06: U5.J7@52.808,68.985 53.008,68.785 53.008,68.583 ccw(c53.168,68.583) 53.054,68.471 61.043,60.481 ccw(c61.156,60.595) 61.156,60.435 73.154,60.435 cw(c73.154,60.375) 73.197,60.417 73.415,60.199 cw(c73.373,60.157) 73.415,60.114 72.739,59.438 H1.2@72.549,59.438
AP_D3N: H1.17 U5.E8 | length 25.7
  Top Layer w0.06: U5.E8@53.308,70.985 53.308,70.97 ccw(c53.368,70.97) 53.326,70.927 53.415,70.837 ccw(c53.458,70.88) 53.458,70.82 53.548,70.82 ccw(c53.548,70.88) 53.608,70.88 cw(c54.002,70.88) 54.002,71.274 62.23,71.274 62.31,71.274 ccw(c62.31,71.367) 62.404,71.367 62.404,71.414 cw(c62.597,71.414) 62.791,71.414 62.791,71.229 ccw(c62.884,71.229) 62.978,71.229 62.978,71.414 cw(c63.171,71.414) 63.365,71.414 63.365,71.367 ccw(c63.458,71.367) 63.458,71.274 63.938,71.274 64.439,71.274 64.469,71.274 ccw(c64.469,71.342) 64.537,71.342 64.537,71.437 cw(c64.605,71.437) 64.674,71.437 64.674,71.342 ccw(c64.742,71.342) 64.742,71.274 65.106,71.274 66.31,71.274 ccw(c66.309,71.575) 66.52,71.361 71.587,76.427 72.906,76.427 73.599,75.734 73.599,75.473 73.634,75.438 H1.17@74.549,75.438
AP_D3P: H1.18 U5.E7 | length 25.7
  Top Layer w0.06: U5.E7@52.808,70.985 52.828,70.965 53.008,70.965 53.073,70.9 53.073,70.888 53.194,70.767 53.223,70.737 ccw(c53.266,70.78) 53.266,70.72 53.548,70.72 ccw(c53.548,70.88) 53.708,70.88 cw(c54.002,70.88) 54.002,71.174 62.23,71.174 62.31,71.174 ccw(c62.31,71.367) 62.504,71.367 62.504,71.414 cw(c62.597,71.414) 62.691,71.414 62.691,71.229 ccw(c62.884,71.229) 63.078,71.229 63.078,71.414 cw(c63.171,71.414) 63.265,71.414 63.265,71.367 ccw(c63.458,71.367) 63.458,71.174 63.938,71.174 66.308,71.174 ; 66.31,71.174 ccw(c66.309,71.575) 66.591,71.29 71.628,76.327 72.865,76.327 73.499,75.693 73.499,75.473 73.464,75.438 H1.18@72.549,75.438
AP_INT: H1.23 U5.A7 | length 25.3
  Top Layer w0.06: U5.A7@52.808,72.985 52.808,73.001 53.322,73.515 cw(c53.365,73.473) 53.365,73.533 53.947,73.533 v1(53.975,73.533) ; v1(58.251,73.552) 58.27,73.533 65.405,73.533 72.263,80.391 73.502,80.391 H1.23@74.549,81.438
  Bottom Layer w0.06: v1(53.975,73.533) 53.994,73.552 v1(58.251,73.552)
AP_MISO: H1.24 U5.B7 | length 24
  Top Layer w0.06: U5.B7@52.808,72.485 53.073,72.75 54.208,72.75 54.61,73.152 v1(54.61,74.041) ; v1(58.039,74.041) 65.127,74.041 ccw(c65.127,74.101) 65.17,74.059 H1.24@72.549,81.438
  Bottom Layer w0.06: v1(54.61,74.041) v1(58.039,74.041)
AP_MOSI: H1.22 U5.A8 | length 21.9
  Top Layer w0.06: U5.A8@53.308,72.985 53.348,73.025 v1(53.721,73.025) ; v1(58.039,73.025) 65.888,73.025 ccw(c65.888,73.085) 65.931,73.043 72.326,79.438 H1.22@72.549,79.438
  Bottom Layer w0.06: v1(53.721,73.025) v1(58.039,73.025)
AP_RST: H1.21 U5.B6 | length 25.4
  Top Layer w0.06: U5.B6@52.308,72.485 52.573,72.75 52.573,73.274 v1@53.848,74.549 ; v1(67.945,74.549) 67.987,74.507 68.03,74.507 71.991,78.468 cw(c72.034,78.426) 72.034,78.486 73.381,78.486 ccw(c73.381,78.546) 73.424,78.504 74.358,79.438 H1.21@74.549,79.438
  Bottom Layer w0.06: v1(53.891,74.603) 53.956,74.603 54.01,74.549 v1(67.945,74.549)
AP_SCK: H1.20 U5.D8 | length 21.7
  Top Layer w0.06: U5.D8@53.308,71.485 61.706,71.485 62.484,72.263 66.523,72.263 ccw(c66.523,72.323) 66.565,72.28 71.706,77.421 cw(c71.748,77.378) 71.747,77.438 H1.20@72.549,77.438
AP_SWIRE: H1.27 U5.B5 | length 28.7
  Top Layer w0.06: U5.B5@51.808,72.485 52.07,72.747 52.07,73.787 v1(53.975,75.692) ; v1(57.992,75.765) 58.008,75.749 62.517,75.749 ccw(c62.517,75.809) 62.559,75.767 71.12,84.328 73.439,84.328 H1.27@74.549,85.438
  Bottom Layer w0.06: v1(53.975,75.692) 54.04,75.692 54.113,75.765 v1(57.992,75.765)
AP_TE: H1.25 U5.C6 | length 28.2
  Top Layer w0.06: U5.C6@52.308,71.985 52.542,71.751 ; 52.543,71.75 ccw(c52.585,71.793) 52.585,71.733 56.849,71.733 ccw(c56.849,71.793) 56.892,71.751 57.387,72.246 ccw(c57.344,72.288) 57.404,72.288 57.404,74.041 57.912,74.549 62.992,74.549 70.739,82.296 73.407,82.296 H1.25@74.549,83.438
AP_TP_RST: H1.19 U5.D7 | length 25.2
  Top Layer w0.06: U5.D7@52.808,71.485 53.066,71.227 v1(53.066,71.225) ; v1(57.404,71.755) 58.293,72.644 66.548,72.644 72.275,78.371 72.823,78.371 73.732,77.461 74.526,77.461 H1.19@74.549,77.438
  Bottom Layer w0.06: v1(53.066,71.225) 53.594,71.754 53.594,71.755 v1(57.404,71.755)
BL_GND: H2.28 R3.2 U3.3 | length 45.6
  Top Layer w0.3: v1(56.261,86.868) 56.261,92.202 56.769,92.71 57.876,92.71 R3.2@57.989,92.823
  Top Layer w0.381: R3.2@57.989,92.823 58.018,92.823 58.231,93.036 58.231,93.064 59.903,94.736 63.536,94.736 65.02,93.253 65.02,93.053 65.179,92.893 U3.3@65.379,92.893
  Bottom Layer w0.3: H2.28@28.734,85.438 29.701,86.405 38.436,86.405 39.751,85.09 54.229,85.09 54.232,85.087 54.48,85.087 v1(56.261,86.868)
BL_VCC: D1.2 H2.26 | length 37.1
  Top Layer w0.5: D1.2@65.101,83.893 65.101,83.87 v1(65.151,83.82)
  Bottom Layer w0.3: H2.26@28.734,83.438 29.701,84.405 31.135,84.405 31.148,84.391 37.658,84.391 cw(c37.658,84.092) 37.87,84.304 38.266,83.908 ccw(c38.478,84.12) 38.478,83.82 v1(65.151,83.82)
F_CS: LED2.2 U1.1 U5.A2 | length 68.1
  Top Layer w0.06: v1(45.339,112.141) 48.133,114.935 v1(48.514,114.935) ; v1(47.625,88.9) 47.86,88.665 U1.1@49.314,88.665 49.74,88.665 cw(c49.74,88.605) 49.782,88.648 50.167,88.263 cw(c50.124,88.221) 50.184,88.222 ; 50.184,88.221 50.184,80.615 49.93,80.361 49.93,78.206 50.308,77.828 U5.A2@50.308,72.985 ; v1(65.024,121.793) 65.278,122.047 LED2.2@66.294,122.047
  Bottom Layer w0.06: v1(45.339,112.141) 45.339,94.488 44.704,93.853 44.704,91.821 v1(47.625,88.9) ; v1(48.514,114.935) 58.166,114.935 v1(65.024,121.793)
F_MISO: U1.2 U5.B2 | length 16.7
  Top Layer w0.06: U1.2@49.314,88.165 49.341,88.138 49.784,88.138 49.911,88.011 49.911,81.407 49.53,81.026 49.53,73.595 50.043,73.082 50.043,72.918 50.282,72.679 50.282,72.511 U5.B2@50.308,72.485
F_MOSI: U1.5 U5.C1 | length 19.3
  Top Layer w0.06: v1(48.133,74.168) 48.133,73.66 U5.C1@49.808,71.985 ; v1(48.133,75.311) 49.022,76.2 v1(49.022,86.233) ; v1(52.197,86.614) 52.197,87.07 52.292,87.165 U1.5@52.314,87.165
  Bottom Layer w0.06: v1(48.133,74.168) v1(48.133,75.311) ; v1(49.022,86.233) 51.689,86.233 52.112,86.656 52.155,86.656 v1(52.197,86.614)
F_SCK: LED1.4 U1.6 U5.B1 | length 58.9
  Top Layer w0.06: LED1.4@42.342,123.396 42.427,123.396 42.847,122.976 42.847,122.891 44.45,121.288 v1(44.45,112.141) ; v1(48.514,76.454) v1(48.514,86.487) ; v1(49.403,72.771) 49.449,72.725 49.568,72.725 U5.B1@49.808,72.485 ; v1(51.181,86.614) 51.562,86.995 51.562,87.249 51.883,87.57 52.219,87.57 U1.6@52.314,87.665
  Bottom Layer w0.06: v1(44.45,112.141) 44.45,90.043 48.006,86.487 51.029,86.487 ccw(c51.029,86.547) 51.072,86.505 v1(51.181,86.614) ; v1(48.514,76.454) 48.514,73.66 v1(49.403,72.771)